# EAGLE board PCB-JOY-4AXIS_v07-18 (EAGLE 7.7.0)
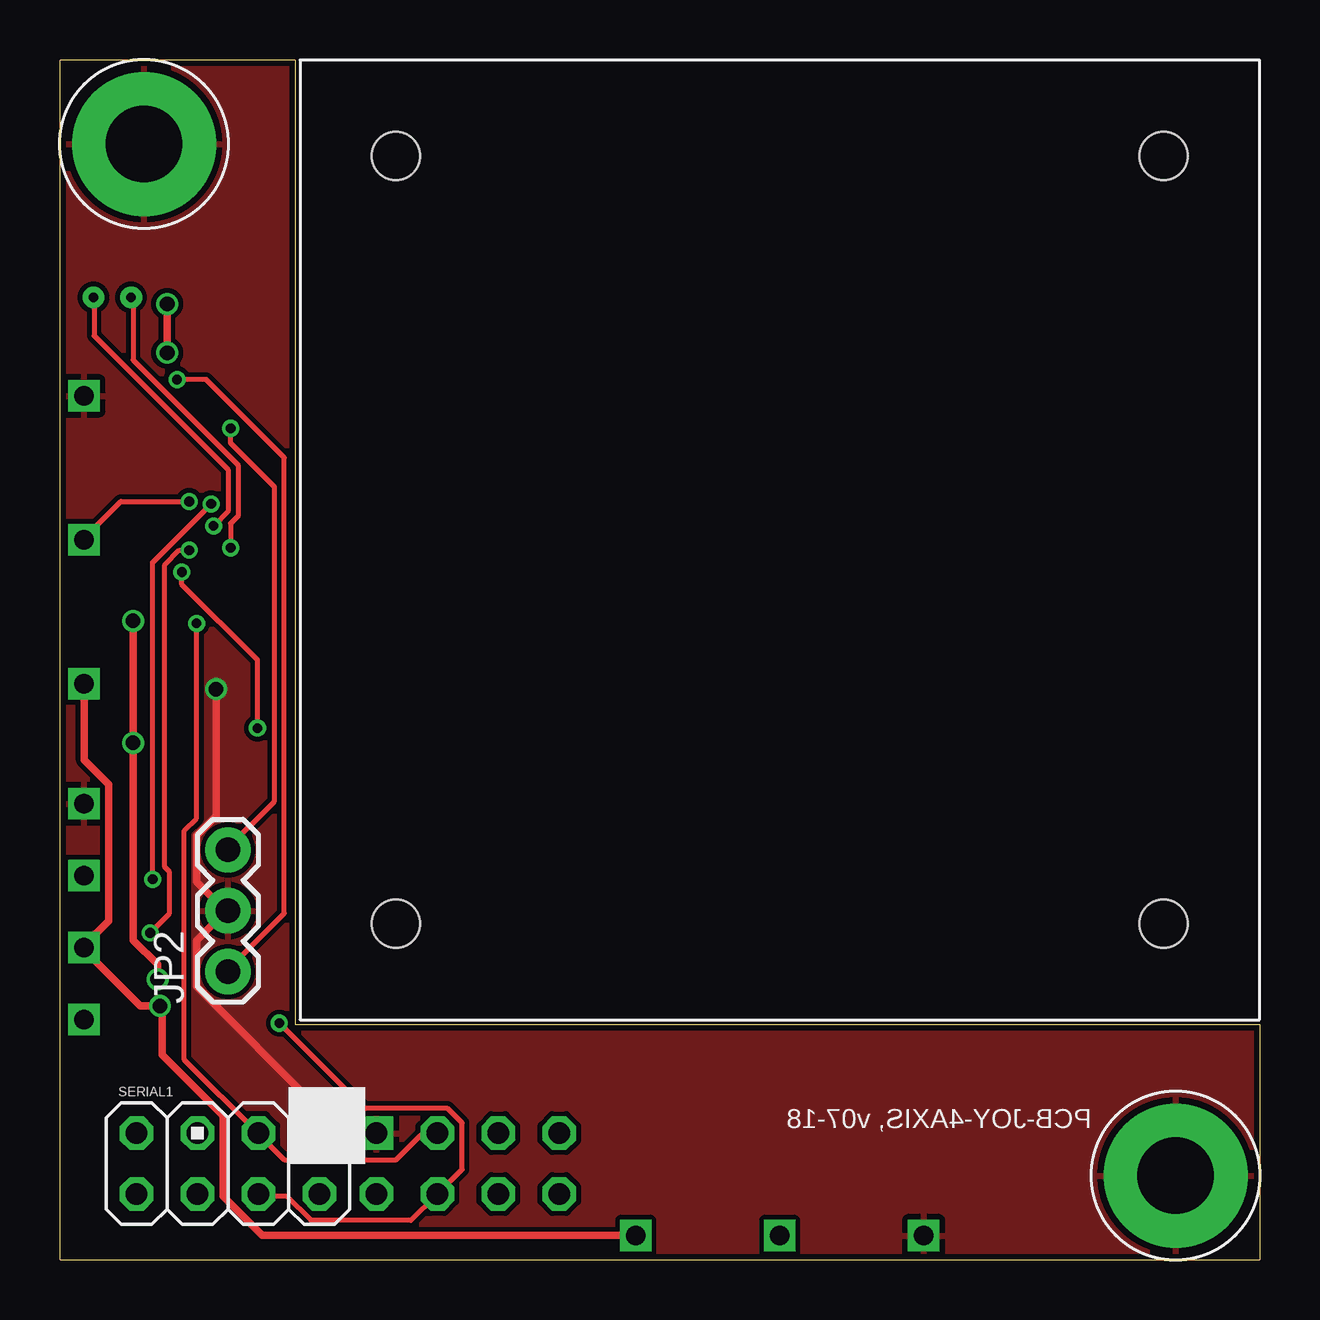
[diagram p0: board, top side]
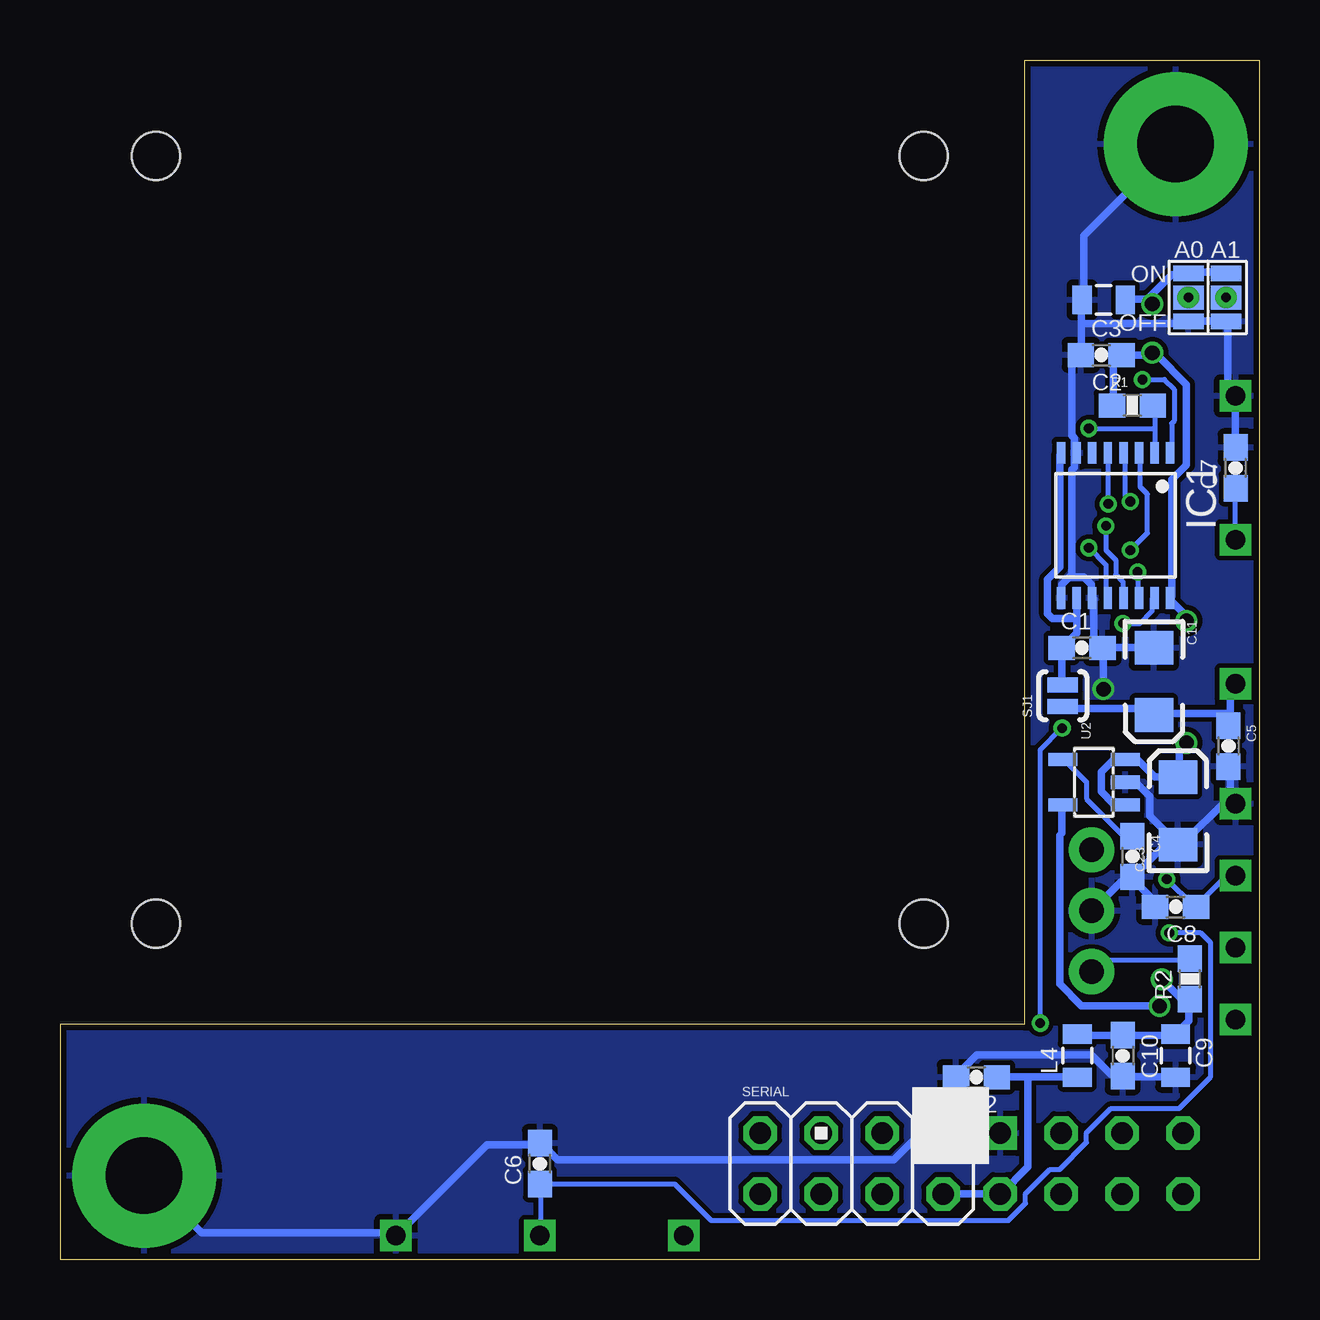
[diagram p1: board, bottom side, seen from below]

Size 50 x 50 mm. Coordinates in mm from the lower left corner, seen from the top.
Outline: 0,0 50,0 50,9.8 9.8,9.8 9.8,50 0,50 0,0
Copper layers (1*16): Top 0.035mm / dielectric 1.5mm / Bottom 0.035mm
Design rules "Fusion_eagle_rule_v1.1": minimum track width 6mil, minimum drill 12mil, track to track 6mil, track to pad 6mil, pad to pad 6mil, via to via 6mil, smd to smd 0mil, copper to edge 10mil, drill to drill 10mil, minimum pad ring 10mil, minimum via ring 6mil, stop-mask expansion 2mil, vias tented up to drill 100mil, thermal gap 10mil
Net classes: 0 default: width 0.203 mm, drill 0.406 mm, clearance 0.203 mm; 1 Power: width 0.305 mm, drill 0.61 mm, clearance 0.203 mm

## Footprints (pad centres in the part's own frame; a part is rotated, then mirrored left to right if it is on the bottom)
0603-CAP = smd 1.1 x 1: 1 -0.85,0; 2 0.85,0
0805 = smd 0.8 x 1.2: 1 -0.9,0; 2 0.9,0
EIA3216 = smd 1.4 x 1.6: A 1.4,0; C -1.4,0
TSSOP16-PW = smd 0.35 x 0.9: 1 -2.275,-3.025; 2 -1.625,-3.025; 3 -0.975,-3.025; 4 -0.325,-3.025; 5 0.325,-3.025; 6 0.975,-3.025; 7 1.625,-3.025; 8 2.275,-3.025; 9 2.275,3.025; 10 1.625,3.025; 11 0.975,3.025; 12 0.325,3.025; 13 -0.325,3.025; 14 -0.975,3.025; 15 -1.625,3.025; 16 -2.275,3.025
1X03 = drill 1.016 pad 1.88: 1 0,0; 2 2.54,0; 3 5.08,0
0603-RES = smd 1.1 x 1: 1 -0.85,0; 2 0.85,0
M2X4SMALLER = drill 0.9 square: 1 -1.27,3.81 | drill 0.9 octagon: 2 1.27,3.81; 3 -1.27,1.27; 4 1.27,1.27; 5 -1.27,-1.27; 6 1.27,-1.27; 7 -1.27,-3.81; 8 1.27,-3.81
SJ_2S-NO = smd 0.635 x 1.27: 1 -0.45,0; 2 0.45,0
SOT23-5 = smd 0.55 x 1.2: 1 -0.95,-1.3; 2 0,-1.3; 3 0.95,-1.3; 4 0.95,1.3; 5 -0.95,1.3
3.2MMPAD6MM = drill 3.2 pad 6: P$1 0,0
JOYSTICK = drill 0.8 square: LR_C 0,29; LR_COM -6,29; LR_V 6,29; PUSH 29,20; ROT_C 29,14; ROT_COM 29,11; ROT_V 29,17; UD_C 29,0; UD_COM 29,-6; UD_V 29,6 | hole 2: -16,16; 16,16; 16,-16; -16,-16
2BITADDR_SMALL = drill 0.4: A0 -1.565,0; A1 0,0 | smd 1.27 x 1: AS0 -1.565,0; AS1 0,0 | smd 1.27 x 0.635: H0 -1.565,1; H1 0,1; L0 -1.565,-1; L1 0,-1

## Placement (x,y rotation side)
C1  100nF  [0603-CAP]  7.4,25.5 0 bottom
C2  100nF  [0603-CAP]  6.6,37.7 180 bottom
C3  10uF  [0805]  6.5,40 180 bottom
C4  1nF  [0603-CAP]  5.3,16.8 270 bottom
C5  100nF  [0603-CAP]  1.3,21.4 270 bottom
C6  10n  [0603-CAP]  30,4 90 bottom
C7  10n  [0603-CAP]  1,33 90 bottom
C8  10n  [0603-CAP]  3.5,14.7 180 bottom
C9  22uF  [0805]  3.5,8.5 270 bottom
C10  100nF  [0603-CAP]  5.7,8.5 270 bottom
C11  10uF 6.3V A TANT  [EIA3216]  4.4,24.1 270 bottom
C12  100nF  [0603-CAP]  11.8,7.6 180 bottom
C23  10uF 6.3V A TANT  [EIA3216]  3.4,18.7 90 bottom
IC1  ADS7828  [TSSOP16-PW]  6,30.6 180 bottom
JP2  [1X03]  7,12 90 top
L4  ILHB0805ER121V  [0805]  7.6,8.5 90 bottom
R1  10k  [0603-RES]  5.3,35.6 0 bottom
R2  10k  [0603-RES]  2.9,11.7 90 bottom
SERIAL  M04X2M2X4SMALLER  [M2X4SMALLER]  17,4 270 bottom
SERIAL1  M04X2M2X4SMALLER  [M2X4SMALLER]  7,4 270 top
SJ1  SOLDERJUMPERNO  [SJ_2S-NO]  8.2,23.5 90 bottom
U2  MIC5205-3.3YM5  [SOT23-5]  6.9,19.9 90 bottom
U$1  GNDPAD6MM  [3.2MMPAD6MM]  3.5,46.5 0 top
U$5  JOYSTICK_3WAYS  [JOYSTICK]  30,30 180 top
U$6  GNDPAD6MM  [3.2MMPAD6MM]  46.5,3.5 0 top
U$19  2BITADDRSMALL  [2BITADDR_SMALL]  1.4,40.1 0 bottom

## Library data of the parts
C1 C2 C10 = SparkFun; SKAARHOJ_ID: SK_100nF
C3 = SparkFun; SKAARHOJ_ID: SK_10uF
C4 C5 JP2 R1 SJ1 = SparkFun
C6-C8 = SparkFun; SKAARHOJ_ID: SK_10nF
C9 = SparkFun; SKAARHOJ_ID: SK_22uF
C11 C23 = freetronics
C12 = SparkFun; SKAARHOJ_ID: SK_100nF; TEST: test; TEST2: testt2
IC1 = burr-brown; MF: TEXAS INSTRUMENTS; MPN: ADS7828E/250; OC_FARNELL: 1470338; OC_NEWARK: 74C7158; SKAARHOJ_ID: SK_ADS7828
L4 = SparkFun; SKAARHOJ_ID: SK_10uHBEAD
R2 = SparkFun; SKAARHOJ_ID: SK_10K
SERIAL SERIAL1 = SKAARHOJ; SKAARHOJ_ID: SK_2x4header
U2 = microbuilder
U$1 U$5 U$6 U$19 = SKAARHOJ

## Nets
5V [Power]: C2.1 C3.1 C9.1 C10.1 C23.A IC1.16 L4.2 R1.1 R2.1 U2.1 U2.3 U$19.H0 U$19.H1
5V_AD [Power]: C1.1 IC1.8 IC1.10 SJ1.2
A0: IC1.12 U$19.A0 U$19.AS0
A1: IC1.13 U$19.A1 U$19.AS1
ARD_5V [Power]: C12.1 L4.1 SERIAL1.2 SERIAL.2
FRONT: IC1.1 JP2.1 R2.2
FRONT2: IC1.2 JP2.3 R1.2
GND [Power]: C1.2 C2.2 C3.2 C4.2 C5.2 C6.2 C7.2 C8.2 C9.2 C10.2 C11.C C12.2 C23.C IC1.7 IC1.9 IC1.11 JP2.2 SERIAL1.1 SERIAL.1 U2.2 U$1.P$1 U$5.LR_COM U$5.ROT_COM U$5.UD_COM U$6.P$1 U$19.L0 U$19.L1
I2C_SCL: IC1.14 SERIAL1.4 SERIAL.4
I2C_SDA: IC1.15 SERIAL1.3 SERIAL.3
JOY_1: C6.1 IC1.3 U$5.LR_C
JOY_2: C7.1 IC1.4 U$5.UD_C
JOY_3: C8.1 IC1.5 U$5.ROT_C
N$1: C4.1 U2.4
REF [Power]: C5.1 C11.A SJ1.1 U2.5 U$5.LR_V U$5.ROT_V U$5.UD_V

## Tracks (layer width: path | path; a pad name or v marks a point on that pad's centre or on a via)
5V  (via drill 0.61)
  Top 0.305: v3.05,26.62 v3.05,21.54 3.05,13.31 4.06,12.29 v4.06,11.68 | v4.47,37.8 v4.47,39.83
  Bottom 0.305: L4.2 7.52,9.35 5.79,9.35 C10.1 5.59,9.35 3.56,9.35 C9.1 3.45,9.45 2.95,9.96 2.95,10.77 R2.1 3.05,10.87 3.25,10.87 v4.06,11.68 | 4.67,40.03 5.59,40.03 C3.1 | 4.67,40.03 3.66,41.05 3.05,41.05 U$19.H0 2.85,41.15 1.42,41.15 U$19.H1 | U2.1 5.69,19 6.1,19 6.6,19.51 6.6,20.32 6.1,20.83 5.69,20.83 U2.3 5.49,20.83 5.08,20.83 4.37,20.12 3.45,20.12 C23.A 3.35,20.22 3.35,21.23 v3.05,21.54 | 4.47,37.69 5.69,37.69 C2.1 5.79,37.59 6.1,37.29 6.1,35.66 R1.1 | 4.47,37.69 4.27,37.69 3.05,36.47 3.05,33.12 3.66,32.51 3.66,27.64 IC1.16 3.66,27.43 3.05,26.82 v3.05,26.62 | v4.47,39.83 4.67,40.03 | v4.47,37.8 4.47,37.69
5V_AD
  Bottom 0.305: 7.62,26.72 7.62,26.11 8.23,25.5 C1.1 8.23,25.4 8.23,23.98 SJ1.2 | 7.62,26.72 7.62,27.53 IC1.10 | 7.62,26.72 8.64,26.72 8.84,26.92 8.84,28.35 8.33,28.85 8.33,33.53 IC1.8
A0  (via drill 0.41)
  Top 0.203: v7.11,29.67 7.11,30.68 7.42,30.99 7.42,33.12 3.05,37.49 3.05,40.03 U$19.AS0
  Bottom 0.203: v7.11,29.67 6.4,28.96 6.4,27.64 IC1.12 | 2.95,40.13 U$19.AS0
A1  (via drill 0.41)
  Top 0.203: v6.4,30.58 7.01,31.19 7.01,32.92 1.42,38.51 1.42,40.03 U$19.AS1
  Bottom 0.203: v6.4,30.58 6.4,29.57 5.99,29.16 5.99,28.55 5.69,28.25 5.69,27.64 IC1.13 | 1.42,40.13 U$19.AS1
ARD_5V
  Bottom 0.305: 9.65,7.62 7.62,7.62 L4.1 | 9.65,7.62 10.87,7.62 C12.1 | 9.65,7.62 9.65,3.86 10.77,2.74 SERIAL1.2 10.97,2.74 13.11,2.74 SERIAL.2
FRONT  (via drill 0.41)
  Top 0.203: v4.88,36.68 6.1,36.68 9.35,33.43 9.35,14.43 7.01,12.09 JP2.1
  Bottom 0.203: v4.88,36.68 3.96,36.68 3.56,36.27 3.56,34.95 3.66,34.85 3.66,33.63 IC1.1 | R2.2 2.95,12.5 6.5,12.5 6.91,12.09 JP2.1
FRONT2  (via drill 0.41)
  Top 0.203: v7.11,34.65 7.11,34.04 8.94,32.21 8.94,19.1 7.01,17.17 JP2.3
  Bottom 0.203: 4.37,34.65 4.37,35.56 R1.2 | 4.37,34.65 IC1.2 | v7.11,34.65 4.37,34.65
GND  (via drill 0.61)
  Top 0.305: SERIAL1.1 10.77,5.28 10.77,6.3 5.69,11.38 5.69,13.31 6.91,14.53 JP2.2 6.81,14.63 5.69,15.75 5.69,17.68 6.5,18.49 v6.5,23.77
  Bottom 0.305: C1.2 6.6,25.5 6.91,25.81 6.91,27.53 IC1.11 7.01,27.64 7.01,28.14 7.32,28.45 7.92,28.45 | 7.92,28.45 8.23,28.14 8.23,27.64 IC1.9 | C11.C 4.47,25.5 6.4,25.5 C1.2 | 7.42,39.01 7.42,37.8 C2.2 7.52,37.69 7.82,37.39 7.82,34.34 7.72,34.24 7.72,33.63 IC1.7 7.72,33.53 7.72,33.02 7.82,32.92 7.82,28.55 7.92,28.45 | 7.42,39.01 7.42,39.93 C3.2 7.32,40.13 7.32,42.67 3.56,46.43 U$1.P$1 | C7.2 1.02,33.93 1.02,35.97 U$5.UD_COM 1.12,36.07 1.32,36.27 1.32,39.01 U$19.L1 1.42,39.12 2.95,39.12 U$19.L0 3.05,39.01 7.42,39.01 | C9.2 3.56,7.62 5.69,7.62 C10.2 5.79,7.72 6.2,7.72 7.01,8.53 11.79,8.53 12.6,7.72 C12.2 12.7,7.52 12.7,5.69 13.11,5.28 SERIAL.1 | SERIAL1.1 10.87,5.28 12.29,5.28 12.6,5.59 SERIAL.1 | C8.2 4.37,14.73 4.37,14.94 5.28,15.85 C4.2 | C4.2 5.38,15.75 5.79,15.75 6.91,14.63 JP2.2 | C5.2 1.22,20.52 1.22,19.3 1.02,19.1 U$5.ROT_COM 1.32,19.2 3.25,17.27 C23.C | U2.2 5.59,19.81 5.08,19.81 4.57,19.3 4.57,18.49 3.45,17.37 C23.C | C4.2 5.18,16.05 3.76,17.48 C23.C | U$6.P$1 46.43,3.45 44.09,1.12 36.07,1.12 U$5.LR_COM 35.97,1.02 32.21,4.78 30.07,4.78 C6.2 29.87,4.78 29.26,4.17 15.24,4.17 14.22,5.18 13.31,5.18 SERIAL.1 | v6.5,23.77 6.5,25.4 C1.2
  pour Top: 0,0 50,0 50,10 10,10 10,50 0,50
  pour Bottom: 0,0 50,0 50,10 10,10 10,50 0,50
I2C_SCL  (via drill 0.41)
  Top 0.203: v5.08,28.65 5.08,28.14 8.23,24.99 v8.23,22.15 | v9.14,9.86 12.7,6.3 16.15,6.3 16.76,5.69 16.76,3.76 15.75,2.74 SERIAL.4 15.65,2.64 14.63,1.63 10.46,1.63 9.45,2.64 8.33,2.64 SERIAL1.4
  Bottom 0.203: v5.08,28.65 5.08,27.64 IC1.14 | v8.23,22.15 9.14,21.23 v9.14,9.86
I2C_SDA  (via drill 0.41)
  Top 0.203: v5.69,26.52 5.69,18.39 5.18,17.88 5.18,8.33 8.23,5.28 SERIAL1.3 8.33,5.18 9.35,4.17 14.02,4.17 15.04,5.18 15.65,5.18 SERIAL.3
  Bottom 0.203: v5.69,26.52 4.98,26.52 4.47,27.03 4.47,27.53 IC1.15
JOY_1  (via drill 0.41)
  Top 0.203: v5.38,29.57 4.98,29.57 4.37,28.96 4.37,16.36 4.57,16.15 4.57,14.43 v3.76,13.61
  Bottom 0.203: v5.38,29.57 4.67,30.28 4.67,31.9 4.98,32.21 4.98,33.53 IC1.3 | v3.76,13.61 2.44,13.61 2.03,13.21 2.03,7.62 3.35,6.3 6.2,6.3 7.21,5.28 7.21,4.88 8.33,3.76 8.74,3.76 9.75,2.74 9.75,2.34 10.46,1.63 22.86,1.63 24.38,3.15 29.97,3.15 C6.1 29.97,3.05 29.97,1.02 U$5.LR_C
JOY_2  (via drill 0.41)
  Top 0.203: v5.38,31.6 2.54,31.6 1.02,30.07 U$5.UD_C
  Bottom 0.203: v5.38,31.6 5.59,31.8 5.59,33.53 IC1.4 | C7.1 1.02,32.11 1.02,30.07 U$5.UD_C
JOY_3  (via drill 0.41)
  Top 0.203: v6.3,31.5 3.86,29.06 v3.86,15.85
  Bottom 0.203: v6.3,31.5 6.3,33.53 IC1.5 | v3.86,15.85 2.74,14.73 C8.1 2.64,14.73 1.42,15.95 1.02,15.95 U$5.ROT_C
N$1
  Bottom 0.203: C4.1 5.38,17.68 5.69,17.68 7.21,19.2 7.21,19.91 8.13,20.83 U2.4
REF  (via drill 0.61)
  Top 0.305: U$5.LR_V 23.98,1.02 8.43,1.02 6.81,2.64 6.81,5.99 4.27,8.53 4.27,10.46 v4.17,10.57 3.35,10.57 1.02,12.9 U$5.ROT_V 1.02,13.11 2.03,14.12 2.03,19.81 1.02,20.83 1.02,23.98 U$5.UD_V
  Bottom 0.305: SJ1.1 8.13,22.96 4.67,22.96 4.47,22.76 C11.A 4.27,22.76 1.32,22.76 C5.1 1.22,22.25 1.22,23.77 1.02,23.98 U$5.UD_V | v4.17,10.57 7.42,10.57 8.33,11.48 8.33,17.68 8.23,17.78 8.23,18.9 U2.5

## Text on the board
_tsilk: PCB-JOY-4AXIS, v07-18